# Altium PCB ClockPCB.PcbDoc (part 2 of 2)
Units mm, origin at the board's own origin, x right, y up, seen from the top; angles counter-clockwise.
Board outline 90 x 40 mm, 4 copper layers (Top Layer, L2, L3, Bottom Layer), stack 1.564 mm thick; 138 components, 106 nets, 450 pads, 188 vias.
Unrouted connection lines stored in the file: 60.
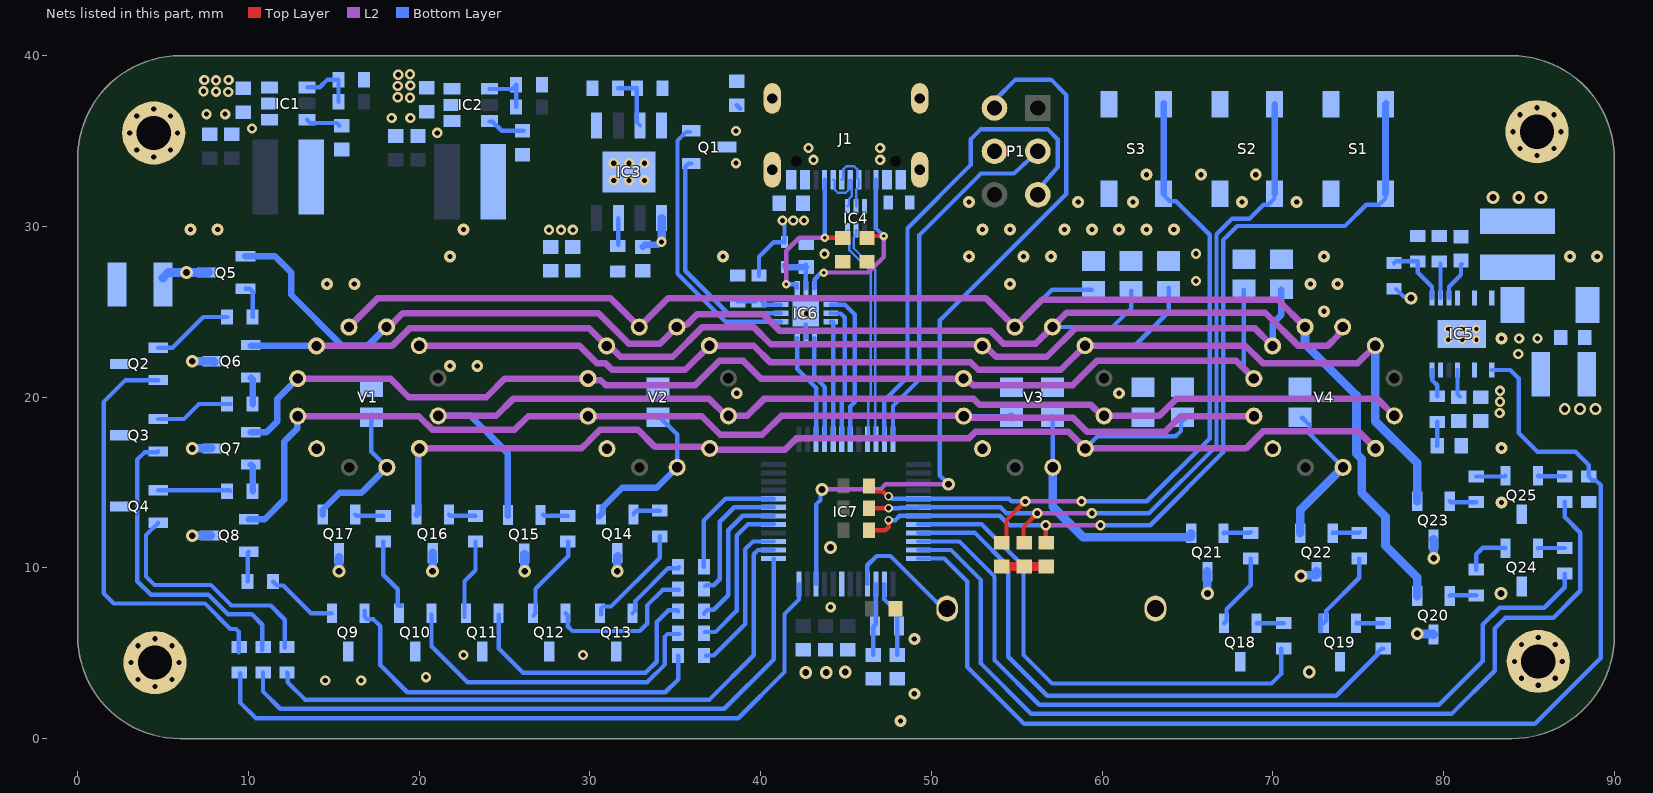
[diagram p4: the nets of this part, all layers, seen from the top]

## Via types
v1: diameter 0.6, hole 0.3, Top Layer to Bottom Layer, tented both sides, 61 vias
v2: diameter 0.7, hole 0.3, Top Layer to Bottom Layer, 42 vias
v3: diameter 0.65, hole 0.3, Top Layer to Bottom Layer, tented bottom, 32 vias
v4: diameter 0.75, hole 0.4, Top Layer to Bottom Layer, tented both sides, 25 vias
v5: diameter 0.6, hole 0.3, Top Layer to Bottom Layer, tented top, 6 vias
v6: diameter 0.5, hole 0.25, Top Layer to Bottom Layer, tented both sides, 6 vias
v7: diameter 0.5, hole 0.2, Top Layer to Bottom Layer, tented both sides, 4 vias
v8: diameter 0.5, hole 0.3, Top Layer to Bottom Layer, tented both sides, 4 vias
v9: diameter 0.7, hole 0.4, Top Layer to Bottom Layer, tented both sides, 4 vias
v10: diameter 0.55, hole 0.3, Top Layer to Bottom Layer, tented both sides, 4 vias

## Nets (pads, with @x,y where several pads share a name; then routed paths per layer and width w, separated by ;. In a path a pad name is that pad's centre, name@x,y a point inside that pad or via, vN(x,y) a via of type N, cw(c..) or ccw(c..) an arc to the next point about the centre after c; other vN are vias at no path point) (continued)
+50V: C18.2 C19.2 C20.2 D3.2 Q5.3 Q6.3 Q7.3 Q8.3 Q14.3 Q15.3 Q16.3 Q17.3 Q20.3 Q21.3 Q22.3 Q23.3 R16.2 | length 15.6
  Bottom Layer w0.254: R16.2@77.21,26.34 77.655,25.895 78.005,25.895 v4(78.1,25.8)
  Bottom Layer w0.508: C18.2@5,26.958 5,27.004 5.296,27.3 v4(6.375,27.3) Q5.3@7.575,27.3 7.64,27.3 Q5.3@7.671,27.33 ; v4(6.706,11.887) 6.712,11.894 7.769,11.894 Q8.3@7.775,11.9 ; v4(6.706,17) 7.78,17 Q7.3@7.823,17.043 ; v4(6.706,22.1) Q6.3@7.875,22.1 7.948,22.1 Q6.3@8.001,22.047 ; v4(15.3,9.804) 15.3,10.601 Q17.3@15.316,10.617 ; v4@20.777,9.855 20.789,9.867 20.789,10.857 Q16.3@20.803,10.871 ; Q15.3@26.149,10.807 26.169,10.788 26.169,9.823 v4(26.187,9.804) ; v4@31.598,9.881 31.598,10.643 Q14.3@31.623,10.668 ; v4(66.167,8.509) Q21.3@66.167,9.785 ; v4(71.653,9.525) 71.7,9.571 72.515,9.571 72.561,9.617 Q22.3@72.561,9.785 ; v4(78.461,6.147) 78.483,6.124 79.385,6.124 Q20.3@79.407,6.101 ; Q23.3@79.407,11.665 79.417,11.656 79.417,10.576 v4(79.426,10.566)
  other v4: 20.777,9.804 31.598,9.804
  other v9: 87.1,19.3 88,19.3 88.9,19.3
Anode_A: Q5.1 R14.2 V1.2 V2.2 V3.2 V4.2 | length 78.6
  L2 w0.381: V1.2@18.092,24.115 18.225,24.115 19.025,24.914 30.497,24.914 32.287,23.124 34.101,23.124 35.002,24.025 35.002,24.115 V2.2@35.092,24.115 35.211,24.233 35.652,24.233 36.286,24.867 40.133,24.867 41.1,23.9 53.443,23.9 54.219,23.124 56.101,23.124 V3.2@57.092,24.115 57.92,24.943 69.557,24.943 71.5,23 73.2,23 73.827,23.627 73.827,23.682 74.092,23.947 V4.2@74.092,24.115
  Bottom Layer w0.254: V3.2@57.092,24.115 60.615,24.115 61.7,25.2 R14.2@61.7,26.225
  Bottom Layer w0.381: Q5.1@9.825,28.25 11.55,28.25 12.5,27.3 12.5,26 15.5,23 16.977,23 V1.2@18.092,24.115 ; V2.2@34.974,23.996 V2.2@35.092,24.115
Anode_B: Q23.1 R13.2 V1.1 V2.1 V3.1 V4.1 | length 76.4
  L2 w0.381: V1.1@20.003,23.017 29.386,23.017 30.408,21.995 30.902,21.995 31.297,21.6 35.586,21.6 V2.1@37.003,23.017 39.594,23.017 40.574,22.037 52.309,22.037 52.746,21.6 57.586,21.6 V3.1@59.003,23.017 68.386,23.017 69.408,21.995 74.981,21.995 V4.1@76.003,23.017
  Bottom Layer w0.254: V3.1@59.003,23.017 61.917,23.017 63.9,25 R13.2@63.9,26.225 R13.2@63.9,26.4
  Bottom Layer w0.508: V4.1@76.003,23.017 76.003,18.594 78.457,16.14 Q23.1@78.457,13.915
Anode_C: Q16.1 R21.2 V1.10 V2.10 V3.10 V4.10 | length 69.5
  L2 w0.381: V1.10@20.017,16.997 20.031,17.011 29.511,17.011 29.925,17.425 ; 29.925,17.426 30.553,18.054 ; 30.554,18.054 30.6,18.1 32.8,18.1 33.816,17.084 36.93,17.084 37.103,16.911 41.411,16.911 42.1,17.6 52.207,17.6 52.584,17.978 58.036,17.978 V3.10@59.017,16.997 68.424,16.997 69.418,17.991 75.024,17.991 V4.10@76.017,16.997
  Bottom Layer w0.254: V3.10@59.017,16.997 59.741,17.72 64.32,17.72 64.618,18.018 64.618,18.518 R21.2@64.9,18.8
  Bottom Layer w0.381: Q16.1@19.85,13.125 19.934,13.209 19.934,16.913 V1.10@20.017,16.997
Anode_D: Q8.1 R24.2 V1.6 V2.6 V3.6 V4.6 | length 68.9
  L2 w0.381: V1.6@12.89,18.888 19.978,18.888 20.776,18.09 25.59,18.09 26.388,18.888 V2.6@29.89,18.888 36.551,18.888 37.64,17.8 40.1,17.8 41.2,18.9 V3.6@51.9,18.9 ; V3.6@51.9,18.888 52.005,18.784 58.308,18.784 59.128,17.963 63.671,17.963 64.596,18.888 V4.6@68.89,18.888
  Bottom Layer w0.254: V3.6@51.89,18.888 54.588,18.888 R24.2@54.6,18.9
  Bottom Layer w0.381: Q8.1@10.025,12.85 10.95,12.85 12.1,14 12.1,17.4 12.863,18.163 12.863,18.861 V1.6@12.89,18.888
  Bottom Layer w0.508: V3.6@51.9,18.9 V3.6@51.901,18.899 ; R24.2@54.668,18.857 R24.2@54.7,18.825
Anode_DP: Q15.1 R22.2 V1.11 V2.11 V3.11 V4.11 | length 69.5
  L2 w0.381: V1.11@21.115,18.908 24.508,18.908 25.496,19.896 36.993,19.896 37.982,18.908 39.208,18.908 40.196,19.896 52.486,19.896 52.837,19.546 59.344,19.546 59.982,18.908 63.358,18.908 64.347,19.896 76.126,19.896 V4.11@77.115,18.908
  Bottom Layer w0.254: V3.11@60.115,18.908 62.492,18.908 R22.2@62.5,18.9
  Bottom Layer w0.381: V1.11@21.115,18.908 22.992,18.908 25.2,16.7 Q15.1@25.2,13.053
Anode_E: Q7.1 R12.2 V1.5 V2.5 V3.5 V4.5 | length 69.5
  L2 w0.381: V1.5@12.885,21.092 18.3,21.092 19.392,20 23.922,20 25.015,21.092 V2.5@29.885,21.092 29.979,20.998 30.642,20.998 30.94,20.7 36.161,20.7 37.58,22.12 38.98,22.12 40.008,21.092 52.053,21.092 52.445,20.7 58.273,20.7 59.692,22.12 67.858,22.12 V4.5@68.885,21.092
  Bottom Layer w0.254: R12.2@68.3,26.3 68.3,21.753 68.885,21.168 V4.5@68.885,21.092
  Bottom Layer w0.381: Q7.1@10.125,17.95 11.054,17.95 11.7,18.596 11.7,19.907 V1.5@12.885,21.092
Anode_F: Q6.1 R11.2 V1.4 V2.4 V3.4 V4.4 | length 66.8
  L2 w0.381: V1.4@13.983,23.003 18.406,23.003 19.428,24.025 29.96,24.025 V2.4@30.983,23.003 31.15,23.003 31.791,22.362 34.859,22.362 36.601,24.105 39.584,24.105 40.589,23.1 V3.4@52.886,23.1 ; V3.4@52.983,23.003 53.15,23.003 53.791,22.362 56.765,22.362 58.428,24.025 68.96,24.025 69.886,23.1 V4.4@70,23.1
  Bottom Layer w0.381: Q6.1@10.148,23.027 V1.4@13.959,23.027 ; V4.4@69.983,23.003 69.983,24.297 70.5,24.814 R11.2@70.5,26.3
Anode_G: Q20.1 R15.2 V1.3 V2.3 V3.3 V4.3 | length 83.9
  L2 w0.381: V1.3@15.888,24.11 17.582,25.803 31.195,25.803 V2.3@32.888,24.11 34.579,25.8 53.198,25.8 V3.3@54.853,24.145 ; V3.3@54.915,24.206 54.985,24.206 56.484,25.705 70.293,25.705 V4.3@71.888,24.11
  Bottom Layer w0.254: V3.3@54.888,24.11 57.079,26.3 R15.2@59.4,26.3
  Bottom Layer w0.508: V4.3@71.888,24.11 71.888,23.112 74.9,20.1 74.9,16.689 75.2,16.389 75.2,14.4 76.6,13 76.6,11.3 78.457,9.443 Q20.1@78.457,8.351
DB: IC6.10 IC7.31 | length 9.1
  Bottom Layer w0.254: IC6.10@44.097,25.417 44.941,25.417 45.517,24.841 45.517,19.717 45.25,19.45 IC7.31@45.25,17.538
FLT: IC6.11 IC7.30 | length 8.1
  Bottom Layer w0.254: IC6.11@44.097,24.917 44.109,24.905 44.691,24.905 44.933,24.663 44.933,20.033 44.75,19.85 IC7.30@44.75,17.538
GND: BT1.1 C1.1 C2.1 C3.1 C4.1 C7.1 C8.1 C9.1 C10.1 C11.1 C12.1 C13.1 C14.1 C15.1 C16.1 C17.1 C18.1 C19.1 C20.1 C21.1 C22.1 C23.1 C24.1 C25.1 C26.1 C27.1 C28.1 C29.1 C30.1 C31.1 C32.1 D1.2 IC1.1 IC2.1 IC3.1 IC4.3 IC5.7 IC5.12 IC5.17 IC6.2 IC6.13 IC7.7 J1.A1_B12 J1.B1_A12 J1.SH1 J1.SH2 J1.SH3 J1.SH4 MH1.0 MH2.0 MH3.0 MH4.0 P1.4 Q2.3 Q3.3 Q4.3 Q9.3 Q10.3 Q11.3 Q12.3 Q13.3 Q18.3 Q19.3 Q24.3 Q25.3 R1.1 R3.1 R6.1 R7.1 R8.1 R9.1 R11.1 R12.1 R13.1 R14.1 R15.1 R18.1 R20.1 R21.1 R22.1 R23.1 R24.1 R25.1 R26.1 R31.1 S1.4 S2.4 S3.4 V1.7 V2.7 V3.7 V4.7 | length 3.4
  Top Layer w0.508: C32.1@54.1,10.1 54.12,10.08 C32.1@54.132,10.08 C31.1@55.432,10.08 C30.1@56.732,10.08
  Bottom Layer w0.254: IC6.2@42.647,23.467 IC6.13@42.647,24.257
  other v1: 14.5,3.4 16.6,3.4 20.4,3.6 22.6,4.9 29.6,4.9 44.1,7.7 84.379,22.53 84.43,23.444 85.496,23.444 42.697,24.892 65.5,26.8 43.739,28.397 65.5,28.4 21.057,35.484 10.211,35.738 18.39,36.347 19.482,36.347 7.544,36.576 8.636,36.576
  other v2: 48.2,1.03 49,2.63 49,5.83 83.4,13.83 83.4,17.03 38.6,20.23 61,20.23 21.8,21.83 23.4,21.83 83.4,23.43 73,25.03 14.6,26.63 16.2,26.63 54.6,26.63 72.2,26.63 73.8,26.63 21.8,28.23 37.8,28.23 52.2,28.23 55.4,28.23 57,28.23 73,28.23 87.4,28.23 89,28.23 6.6,29.83 8.2,29.83 22.6,29.83 53,29.83 54.6,29.83 57.8,29.83 59.4,29.83 61,29.83 62.6,29.83 64.2,29.83 52.2,31.43 58.6,31.43 61.8,31.43 68.2,31.43 71.4,31.43 62.6,33.03 65.8,33.03 69,33.03
  other v3: 4.525,3.05 85.55,3.125 3.535,3.46 5.515,3.46 84.56,3.535 86.54,3.535 3.125,4.45 5.925,4.45 84.15,4.525 86.95,4.525 3.535,5.44 5.515,5.44 84.56,5.515 86.54,5.515 4.525,5.85 85.55,5.925 4.45,34.075 85.475,34.15 3.46,34.485 5.44,34.485 84.485,34.56 86.465,34.56 3.05,35.475 5.85,35.475 84.075,35.55 86.875,35.55 3.46,36.465 5.44,36.465 84.485,36.54 86.465,36.54 4.45,36.875 85.475,36.95
  other v4: 42.647,3.872 43.84,3.872 44.958,3.897 72.136,3.912 83.363,8.509 44.1,11.2
  other v5: 31.4,32.7 32.3,32.7 33.2,32.7 31.4,33.7 32.3,33.7 33.2,33.7
  other v6: 80.275,23.365 81.1,23.365 81.926,23.365 80.275,24 81.1,24 81.926,24
Grid1: Q17.1 R26.2 V1.9 | length 8.3
  Bottom Layer w0.254: R26.2@17.2,18.7 17.2,16.802 V1.9@18.112,15.89
  Bottom Layer w0.381: Q17.1@14.35,13.125 14.35,13.4 15.35,14.4 16.621,14.4 V1.9@18.112,15.89 ; R26.2@17.2,18.825 R26.2@17.2,18.9
Grid2: Q14.1 R25.2 V2.9 | length 9.5
  Bottom Layer w0.254: R25.2@33.9,18.8 34.125,18.8 35.112,17.813 V2.9@35.112,15.89
  Bottom Layer w0.381: Q14.1@30.541,13.025 30.759,13.244 30.759,13.559 31.9,14.7 33.921,14.7 V2.9@35.112,15.89
Grid3: Q21.1 R23.2 V3.9 | length 14.4
  Bottom Layer w0.254: R23.2@57.1,18.9 57.112,18.888 V3.9@57.112,15.89
  Bottom Layer w0.508: V3.9@57.112,15.89 57.112,13.588 58.9,11.8 65.171,11.8 65.217,11.846 Q21.1@65.217,12.035
Grid4: Q22.1 R20.2 V4.9 | length 8.8
  Bottom Layer w0.254: R20.2@71.7,18.8 71.725,18.8 72.148,18.377 72.148,17.854 V4.9@74.112,15.89
  Bottom Layer w0.508: Q22.1@71.611,12.035 71.611,13.39 V4.9@74.112,15.89
Grid_1: IC7.17 R47.1 | length 9.2
  Bottom Layer w0.254: R47.1@36.75,6.248 37.348,6.248 38.6,7.5 38.6,11.9 39.25,12.55 IC7.17@40.762,12.55
Grid_2: IC7.20 R40.1 | length 7.3
  Bottom Layer w0.254: R40.1@36.671,10.068 36.671,12.771 37.95,14.05 IC7.20@40.762,14.05
Grid_3: IC7.44 R46.1 | length 29.9
  Bottom Layer w0.254: IC7.44@49.238,12.55 52.95,12.55 55.4,10.1 55.4,4.9 57.074,3.226 69.926,3.226 70.485,3.785 R46.1@70.485,5.258
Grid_4: IC7.45 R45.1 | length 35.5
  Bottom Layer w0.254: IC7.45@49.238,12.05 52.55,12.05 54.5,10.1 54.5,4.8 56.785,2.515 73.715,2.515 76.144,4.944 76.144,5.044 76.367,5.267 R45.1@76.467,5.267
HV_enable: IC5.1 IC7.48 R31.2 | length 70.1
  Bottom Layer w0.254: IC7.48@49.238,10.55 50.75,10.55 52.1,9.2 52.1,4.2 55.436,0.864 85.344,0.864 89.204,4.724 89.204,14.852 88.929,15.127 88.723,15.127 R31.2@88.5,15.35 88.5,16.029 87.729,16.8 85.5,16.8 84.4,17.9 84.4,21.1 83.905,21.595 IC5.1@82.819,21.595
NetC5_1: C5.1 IC2.6 | length 2.2
  Bottom Layer w0.254: IC2.6@24.133,36.15 24.283,36.15 24.833,35.6 C5.1@26.133,35.6
NetC5_2: C5.2 IC2.2 L2.1
NetC6_1: C6.1 IC1.6 | length 2
  Bottom Layer w0.254: IC1.6@13.427,36.25 13.62,36.057 15.17,36.057 C6.1@15.327,35.9
NetC6_2: C6.2 IC1.2 L1.1
NetC13_2: C13.2 IC5.11 | length 2.3
  Bottom Layer w0.254: IC5.11@80.319,25.809 80.319,26.463 81.026,27.169 81.026,27.769 C13.2@81.058,27.802
NetC14_2: C14.2 D2.1 IC6.8 | length 2.5
  Bottom Layer w0.254: IC6.8@42.647,26.367 C14.2@42.647,27.603 ; C14.2@42.647,27.741 C14.2@42.647,27.773
  Bottom Layer w0.381: D2.1@41.453,27.723 D2.1@41.46,27.73 ; D2.1@41.46,27.603 C14.2@42.647,27.603
NetC22_2: C22.2 IC5.5 | length 1.6
  Bottom Layer w0.254: IC5.5@80.819,21.595 80.819,20.175 C22.2@80.958,20.036
NetC23_2: C23.2 R27.1 | length 1.4
  Bottom Layer w0.254: C23.2@79.629,17.145 R27.1@79.629,18.554
NetD3_1: D3.1 IC5.14 IC5.16 L3.2
NetIC1_4: IC1.4 R1.2 R5.1 | length 3.3
  Bottom Layer w0.254: IC1.4@13.427,38.15 14.177,38.15 14.627,38.6 R1.2@15.277,38.6 R5.1@15.277,37.3
NetIC2_4: IC2.4 R4.1 R6.2 | length 3
  Bottom Layer w0.254: IC2.4@24.133,38.05 25.46,38.05 25.683,38.273 R6.2@25.683,38.3 R4.1@25.683,37
NetIC3_3: IC3.3 R2.1 R3.2 | length 3.4
  Bottom Layer w0.254: R3.2@31.65,38.1 R2.1@32.75,38.1 32.75,36.097 IC3.3@32.935,35.912
NetIC3_7: IC3.7 R9.2 | length 1.6
  Bottom Layer w0.254: IC3.7@31.665,30.488 31.665,28.939 R9.2@31.674,28.931
NetIC5_8: IC5.8 R27.2 | length 1.7
  Bottom Layer w0.254: IC5.8@79.319,21.595 79.345,21.569 79.345,20.985 79.629,20.701 R27.2@79.629,20.054
NetIC5_9: IC5.9 R8.2 R16.1 | length 3.8
  Bottom Layer w0.254: R16.1@77.216,27.952 R8.2@78.486,27.952 78.486,27.305 79.319,26.472 IC5.9@79.319,25.809
NetIC5_10: IC5.10 R7.2 | length 2
  Bottom Layer w0.254: IC5.10@79.819,25.809 R7.2@79.819,27.813
NetIC6_5: IC6.5 Q1.1 | length 13.2
  Bottom Layer w0.254: Q1.1@35.932,33.686 35.783,33.686 35.585,33.488 35.585,27.407 38.075,24.917 IC6.5@41.197,24.917
NetIC6_6: IC6.6 R17.1 R18.2 | length 2.6
  Bottom Layer w0.254: R18.2@38.659,25.615 R17.1@39.712,25.615 ; R17.1@39.712,25.742 R17.1@39.827,25.857 ; R17.1@39.923,25.762 R17.1@40.14,25.544 ; R17.1@40.14,25.417 IC6.6@41.197,25.417
NetQ2_1: Q2.1 R19.1 | length 4.8
  Bottom Layer w0.254: Q2.1@4.725,22.9 5.552,22.9 7.352,24.7 R19.1@8.75,24.7
NetQ2_2: Q2.2 R50.2 | length 25
  Bottom Layer w0.254: Q2.2@4.725,21 2.8,21 1.516,19.716 1.516,8.51 2.11,7.916 7.447,7.916 8.937,6.426 9.275,6.426 9.423,6.277 9.423,5.376 R50.2@9.423,5.057
NetQ3_1: Q3.1 R28.1 | length 4.6
  Bottom Layer w0.254: Q3.1@4.725,18.725 6.225,18.725 7.1,19.6 R28.1@8.95,19.6
NetQ3_2: Q3.2 R49.2 | length 18.4
  Bottom Layer w0.254: Q3.2@4.725,16.825 4.668,16.768 3.918,16.768 3.492,16.342 3.492,9.224 4.292,8.424 7.658,8.424 8.79,7.292 10.189,7.292 10.808,6.673 R49.2@10.808,5.18
NetQ4_1: Q4.1 R32.1 | length 4.2
  Bottom Layer w0.254: Q4.1@4.725,14.55 8.9,14.55 R32.1@8.95,14.5
NetQ4_2: Q4.2 R48.2 | length 14.3
  Bottom Layer w0.254: Q4.2@4.725,12.65 4,11.925 4,9.5 4.5,9 7.8,9 9,7.8 11.301,7.8 12.132,6.969 R48.2@12.132,5.32
NetQ5_2: Q5.2 R19.2 | length 2
  Bottom Layer w0.254: Q5.2@9.825,26.35 10.077,26.35 10.25,26.177 R19.2@10.25,24.7
NetQ6_2: Q6.2 R28.2 | length 1.6
  Bottom Layer w0.381: Q6.2@10.125,21.15 10.141,21.15 10.25,21.041 R28.2@10.25,19.6
NetQ7_2: Q7.2 R32.2 | length 1.6
  Bottom Layer w0.381: Q7.2@10.125,16.05 10.141,16.05 10.25,15.941 R32.2@10.25,14.5
NetQ8_2: Q8.2 R42.2 | length 1.8
  Bottom Layer w0.254: R42.2@9.95,9.2 9.95,10.875 Q8.2@10.025,10.95
NetQ9_1: Q9.1 R42.1 | length 4.2
  Bottom Layer w0.254: R42.1@11.45,9.2 11.45,9.191 11.673,8.968 12.032,8.968 13.649,7.351 Q9.1@14.884,7.351
NetQ9_2: Q9.2 R51.2 | length 23.6
  Bottom Layer w0.254: Q9.2@16.814,7.494 16.814,7.135 16.964,6.984 17.323,6.984 17.729,6.579 17.729,4.293 19.304,2.718 34.418,2.718 35.171,3.471 R51.2@35.171,4.868
NetQ10_1: Q10.1 R36.1 | length 4.3
  Bottom Layer w0.254: R36.1@17.9,11.55 17.9,9.6 18.751,8.749 18.751,7.799 18.782,7.768 Q10.1@18.958,7.768
NetQ10_2: Q10.2 R47.2 | length 19.4
  Bottom Layer w0.254: Q10.2@20.726,7.269 20.726,5.41 22.835,3.302 33.35,3.302 34.392,4.343 34.392,5.976 34.54,6.125 R47.2@35.227,6.125
NetQ11_1: Q11.1 R35.1 | length 4.7
  Bottom Layer w0.254: Q11.1@22.657,7.122 22.657,9.22 23.3,9.864 R35.1@23.3,11.55
NetQ11_2: Q11.2 R44.2 | length 16
  Bottom Layer w0.254: Q11.2@24.663,7.266 24.663,5.283 26.086,3.861 33.261,3.861 33.909,4.509 33.909,6.833 34.588,7.512 35.127,7.512 R44.2@35.171,7.468
NetQ12_1: Q12.1 R34.1 | length 5.2
  Bottom Layer w0.254: Q12.1@26.695,7.214 26.812,7.33 26.812,8.778 28.723,10.689 R34.1@28.723,11.55
NetQ12_2: Q12.2 R43.2 | length 9.1
  Bottom Layer w0.254: Q12.2@28.566,7.351 28.701,7.216 28.701,6.58 28.981,6.3 32.919,6.3 33.35,6.731 33.35,7.798 34.263,8.711 R43.2@35.197,8.711
NetQ13_1: Q13.1 R33.1 | length 6.3
  Bottom Layer w0.254: Q13.1@30.663,7.289 30.663,7.636 30.764,7.737 31.237,7.737 34.1,10.6 R33.1@34.1,11.85
NetQ13_2: Q13.2 R40.2 | length 4.2
  Bottom Layer w0.254: Q13.2@32.491,7.351 32.664,7.524 32.664,8.064 34.588,9.988 35.173,9.988 R40.2@35.218,10.033
NetQ14_2: Q14.2 R33.2 | length 1.7
  Bottom Layer w0.254: Q14.2@32.55,13.125 32.55,13.177 32.723,13.35 R33.2@34.1,13.35
NetQ15_2: Q15.2 R34.2 | length 1.5
  Bottom Layer w0.254: Q15.2@27.25,13.125 27.325,13.05 R34.2@28.7,13.05
NetQ16_2: Q16.2 R35.2 | length 1.6
  Bottom Layer w0.254: Q16.2@21.75,13.125 21.825,13.05 R35.2@23.3,13.05
NetQ17_2: Q17.2 R36.2 | length 1.7
  Bottom Layer w0.254: Q17.2@16.25,13.125 16.325,13.05 R36.2@17.9,13.05
NetQ18_1: Q18.1 R38.1 | length 4.4
  Bottom Layer w0.254: Q18.1@67.147,6.761 67.29,6.904 67.29,7.575 68.707,8.992 R38.1@68.707,10.553
NetQ18_2: Q18.2 R46.2 | length 1.6
  Bottom Layer w0.254: Q18.2@69.053,6.767 R46.2@70.637,6.767
NetQ19_1: Q19.1 R37.1 | length 5.6
  Bottom Layer w0.254: Q19.1@72.798,6.271 Q19.1@72.798,7.215 ; Q19.1@72.977,6.761 73.139,6.922 73.139,7.505 75.057,9.423 R37.1@75.057,10.553
NetQ19_2: Q19.2 R45.2 | length 1.6
  Bottom Layer w0.254: Q19.2@74.905,6.782 74.919,6.767 R45.2@76.467,6.767
NetQ20_2: Q20.2 R41.2 | length 1.6
  Bottom Layer w0.254: Q20.2@80.357,8.351 80.4,8.394 R41.2@81.915,8.394
NetQ21_2: Q21.2 R38.2 | length 1.6
  Bottom Layer w0.254: Q21.2@67.117,12.035 67.135,12.053 68.653,12.053 R38.2@68.7,12.1
NetQ22_2: Q22.2 R37.2 | length 1.6
  Bottom Layer w0.254: Q22.2@73.511,12.035 73.529,12.053 75.053,12.053 R37.2@75.1,12.1
NetQ23_2: Q23.2 R30.2 | length 1.6
  Bottom Layer w0.254: Q23.2@80.357,13.915 80.417,13.855 R30.2@81.915,13.855
NetQ24_1: Q24.1 R41.1 | length 2.8
  Bottom Layer w0.254: R41.1@81.915,9.894 81.915,10.795 82.296,11.176 83.614,11.176 Q24.1@83.632,11.158
NetQ24_2: Q24.2 R39.2 | length 1.6
  Bottom Layer w0.254: Q24.2@85.532,11.158 85.538,11.164 R39.2@87.095,11.164
NetQ25_1: Q25.1 R30.1 | length 1.7
  Bottom Layer w0.254: R30.1@81.915,15.355 83.599,15.355 Q25.1@83.632,15.389
NetQ25_2: Q25.2 R29.2 | length 1.6
  Bottom Layer w0.254: Q25.2@85.532,15.389 85.554,15.367 R29.2@87.095,15.367
NRST: IC7.10 P1.2 | length 44.3
  L2 w0.254: v4(43.6,14.6) 47.017,14.6 47.317,14.9 v4(51,14.9)
  Bottom Layer w0.254: IC7.10@43.25,9.062 43.25,13.717 43.505,13.972 43.505,14.505 v4(43.6,14.6) ; v4(51,14.9) 50.5,15.4 50.5,24.5 57.9,31.9 57.9,37.699 56.999,38.6 54.92,38.6 53.8,37.48 P1.2@53.8,37.4
OSC1: C26.2 IC7.2 Y1.1 | length 4.5
  Bottom Layer w0.254: IC7.2@47.25,9.062 47.25,8.15 48,7.4 48,6.558 47.998,6.556 47.998,4.902 C26.2@48,4.9
OSC2: C27.2 IC7.3 Y1.2 | length 4.2
  Bottom Layer w0.254: C27.2@46.6,4.9 46.598,4.902 46.598,6.556 46.75,6.708 IC7.3@46.75,9.062
PD_CC1: IC6.3 IC7.27 | length 6.4
  Bottom Layer w0.254: IC6.3@42.147,23.467 42.147,21.653 43.25,20.55 IC7.27@43.25,17.538
PD_CC1_C: C1.2 IC6.7 J1.A5 | length 10.1
  Top Layer w0.254: v7@43.782,29.319 v7(43.764,29.337) C1.2@44.806,29.337 ; C1.2@44.62,29.599 C1.2@44.78,29.439
  L2 w0.254: v7(41.5,26.621) 41.5,28.571 42.266,29.337 v7(43.764,29.337)
  Bottom Layer w0.254: v7(41.5,26.621) 42.124,26.621 IC6.7@42.124,26.391 ; v7(43.764,29.337) J1.A5@43.764,32.731
PD_CC2: IC6.1 IC7.28 | length 6.1
  Bottom Layer w0.254: IC6.1@43.147,23.467 43.147,21.192 43.75,20.589 43.75,17.615 IC7.28@43.745,17.61
PD_CC2_C: C2.2 IC6.9 J1.B5 | length 10.9
  Top Layer w0.254: C2.2@46.228,29.413 46.253,29.439 v7(47.219,29.439)
  L2 w0.254: v7(43.7,27.3) 46.299,27.3 47.219,28.219 v7(47.219,29.439)
  Bottom Layer w0.254: IC6.9@43.147,26.367 43.17,26.39 43.17,26.909 43.513,27.253 43.653,27.253 v7(43.7,27.3) ; J1.B5@46.75,32.745 46.75,29.882 v7@47.206,29.426
Seg_A: IC7.12 R50.1 | length 40.6
  Bottom Layer w0.254: R50.1@9.513,3.846 9.513,2.12 10.439,1.194 38.694,1.194 41.4,3.9 41.4,7.3 42.247,8.147 42.247,9.059 IC7.12@42.25,9.062
Seg_B: IC7.47 R29.1 | length 55.6
  Bottom Layer w0.254: IC7.47@49.238,11.05 51.15,11.05 52.9,9.3 52.9,4.4 55.852,1.448 80.467,1.448 82.994,3.974 82.994,6.452 83.615,7.074 86.423,7.074 88.011,8.661 88.011,12.065 87.095,12.981 R29.1@87.095,13.867
Seg_C: IC7.18 R44.1 | length 8.7
  Bottom Layer w0.254: R44.1@36.686,7.315 36.686,7.345 36.894,7.553 37.253,7.553 38.1,8.4 38.1,12.2 38.95,13.05 IC7.18@40.762,13.05
Seg_D: IC7.15 R51.1 | length 9.3
  Bottom Layer w0.254: R51.1@36.804,4.851 36.873,4.851 36.894,4.872 37.257,4.872 39.1,6.715 39.1,11.1 39.55,11.55 IC7.15@40.762,11.55
Seg_DP: IC7.19 R43.1 | length 7.9
  Bottom Layer w0.254: R43.1@36.764,8.944 36.803,8.983 37.253,8.983 37.6,9.33 37.6,12.7 38.45,13.55 IC7.19@40.762,13.55
Seg_E: IC7.14 R48.1 | length 36.6
  Bottom Layer w0.254: R48.1@12.257,3.876 12.302,3.832 12.302,3.294 13.31,2.286 37.008,2.286 39.6,4.878 39.6,10.8 39.847,11.047 40.759,11.047 IC7.14@40.762,11.05
Seg_F: IC7.13 R49.1 | length 38.5
  Bottom Layer w0.254: R49.1@10.857,3.876 10.857,2.757 11.862,1.753 37.871,1.753 40.762,4.643 IC7.13@40.762,10.55
Seg_G: IC7.46 R39.1 | length 49.6
  Bottom Layer w0.254: IC7.46@49.238,11.55 51.65,11.55 53.7,9.5 53.7,4.6 56.319,1.981 79.731,1.981 82.296,4.547 82.296,6.68 83.287,7.671 85.903,7.671 87.095,8.863 R39.1@87.095,9.664
SW1: C30.2 IC7.43 R52.1 S1.1 | length 52.9
  Top Layer w0.254: R52.1@46.35,12.2 47.3,12.2 47.5,12.4 v8(47.5,12.8) ; C30.2@56.7,11.5 v1(56.7,12.5)
  L2 w0.254: v1(56.7,12.5) v1(59.9,12.5)
  Bottom Layer w0.254: v8(47.5,12.8) 47.9,12.8 48.15,13.05 54.011,13.05 54.561,12.5 v1(56.7,12.5) ; v1(59.9,12.5) 62.817,12.5 67.1,16.783 67.1,29.203 67.92,30.023 74.223,30.023 75.471,31.271 76.227,31.271 76.6,31.644 S1.1@76.6,31.919
  Bottom Layer w0.381: S1.1@76.6,31.919 76.6,37.154 S1.1@76.657,37.211
SW2: C31.2 IC7.42 R53.1 S2.1 | length 46.4
  Top Layer w0.254: R53.1@46.4,13.5 v8(47.5,13.5) ; C31.2@55.4,11.4 55.4,12.4 v1(56.2,13.2)
  L2 w0.254: v1(56.2,13.2) v1(59.4,13.2)
  Bottom Layer w0.254: v8(47.5,13.5) 48.131,13.5 48.158,13.527 49.215,13.527 IC7.42@49.238,13.55 54.05,13.55 54.4,13.2 v1(56.2,13.2) ; v1(59.4,13.2) 62.755,13.2 66.7,17.145 66.7,29.54 67.615,30.455 68.636,30.455 69.452,31.271 69.727,31.271 70.1,31.644 S2.1@70.1,31.919
  Bottom Layer w0.381: S2.1@70.1,31.919 S2.1@70.1,37.156
SW3: C32.2 IC7.41 R54.1 S3.1 | length 45.7
  Top Layer w0.254: R54.1@46.5,14.7 46.5,14.55 46.573,14.477 47.156,14.477 47.433,14.2 v8(47.5,14.2) ; C32.2@54.132,11.48 54.4,11.748 54.4,12.8 v1(55.5,13.9)
  L2 w0.254: v1(55.5,13.9) v1(58.8,13.9)
  Bottom Layer w0.254: v8(47.5,14.2) 47.567,14.2 47.717,14.05 54.55,14.05 54.7,13.9 v1(55.5,13.9) ; v1(58.8,13.9) 62.617,13.9 66.3,17.583 66.3,29.509 64.332,31.477 63.973,31.477 63.6,31.85 S3.1@63.6,31.919
  Bottom Layer w0.381: S3.1@63.6,31.919 S3.1@63.6,37.169 63.6,37.209 S3.1@63.602,37.211
SWCLK: IC7.36 P1.3 | length 21.5
  Bottom Layer w0.254: IC7.36@47.75,17.538 47.75,19.48 49.3,21.03 49.3,29.499 52.901,33.1 54.841,33.1 P1.3@56.24,34.4
SWDIO: IC7.35 P1.5 | length 28.6
  Bottom Layer w0.254: IC7.35@47.25,17.538 47.25,19.818 48.6,21.168 48.6,29.9 52.3,33.6 52.3,35.1 52.9,35.7 56.8,35.7 57.4,35.1 57.4,33.475 P1.5@56.3,32.2
TCPP_Vcc: IC6.12 IC7.29 | length 7
  Bottom Layer w0.254: IC6.12@44.097,24.417 44.227,24.417 44.25,24.394 IC7.29@44.25,17.538
USB_MCU_N: IC4.6 IC7.33 | length 12.9
  Bottom Layer w0.14: IC4.6@45.093,29.78 45.173,29.7 45.173,29.358 45.188,29.343 45.188,28.612 46.447,27.353 46.447,19.847 46.295,19.695 46.295,17.583 IC7.33@46.25,17.538
USB_MCU_P: IC4.5 IC7.34 | length 12.8
  Bottom Layer w0.14: IC4.5@45.593,29.78 45.593,29.505 45.455,29.367 45.455,28.722 46.713,27.464 46.713,17.574 IC7.34@46.75,17.538
USB_N: IC4.1 J1.A7 J1.B7 | length 3.9
  Bottom Layer w0.14: J1.B7@44.25,32.745 44.33,32.665 44.33,32.161 44.518,31.973 44.982,31.973 45.17,32.161 45.17,32.665 J1.A7@45.25,32.745 45.33,32.665 45.33,32.166 45.338,32.158 45.338,31.778 45.173,31.614 45.173,31.26 IC4.1@45.093,31.18
USB_P: IC4.2 J1.A6 J1.B6 | length 3.9
  Bottom Layer w0.14: J1.A6@44.75,32.745 44.83,32.825 44.83,33.329 45.018,33.517 45.482,33.517 45.67,33.329 45.67,32.825 J1.B6@45.75,32.745 45.75,32.32 45.605,32.175 45.605,31.192 IC4.2@45.593,31.18
VBAT: BT1.2 IC7.4 | length 7.3
  Bottom Layer w0.254: IC7.4@46.25,9.062 46.25,10.15 46.8,10.7 47.6,10.7 50.276,8.024 50.375,8.024 50.779,7.62 BT1.2@50.927,7.62
VBUS: C4.2 C7.2 C15.2 C16.2 C17.2 C21.2 IC1.3 IC2.3 IC3.5 IC5.3 L3.1 | length 2.6
  Bottom Layer w0.381: C15.2@33.1,28.8 33.226,28.926 33.966,28.926 34.141,29.1 v1(34.2,29.1)
  Bottom Layer w0.508: v1(34.2,29.1) 34.202,29.102 34.202,30.485 IC3.5@34.205,30.488
  other v1: 83.287,19.075 83.312,19.736 83.312,20.371 27.6,29.8 28.3,29.8 29,29.8 19.456,37.541 18.745,37.567 8.814,37.871 8.103,37.897 7.366,37.922 18.745,38.227 19.482,38.252 8.103,38.557 7.417,38.583 8.839,38.583 18.771,38.887 19.456,38.913
  other v4: 82.9,31.7 84.4,31.7 85.7,31.7
VBUS_C: C3.2 C12.2 D1.1 D2.2 J1.A4_B9 J1.B4_A9 Q1.3 R17.2 | length 4.4
  Bottom Layer w0.254: C3.2@38.6,37.1 C3.2@38.8,36.9 ; R17.2@39.903,27.115 39.903,28.219 40.767,29.083 D2.2@41.275,29.083 ; v1(41.275,30.353) 41.275,30.259 41.402,30.132 D2.2@41.402,29.083
  other v1: 41.91,30.353 42.545,30.353 38.557,33.706 43.1,33.9 47,33.9 42.8,34.6 47,34.6 38.557,35.585
VBUS_RAW: IC3.4 IC6.4 Q1.2 R2.2 | length 16
  Bottom Layer w0.254: Q1.2@35.839,35.535 35.636,35.535 35.128,35.027 35.128,27.229 37.94,24.417 IC6.4@41.197,24.417
pads on no net: IC1.5 IC2.5 IC3.2 IC3.6 IC3.8 IC4.4 IC5.6 IC7.1 IC7.5 IC7.8 IC7.9 IC7.11 IC7.16 IC7.21 IC7.22 IC7.23 IC7.24 IC7.25 IC7.26 IC7.32 IC7.37 IC7.38 IC7.39 IC7.40 J1. J1.A8 J1.B8 P1.1 V1.12 V2.12 V3.12 V4.12

## Polygon pours and split planes (outlines as drawn)
GND on Bottom Layer "L4_GND" (solid, pour order 33): 0,6 0,34 cw(c6,34) 6,40 84,40 cw(c84,34) 90,34 90,6 cw(c84,6) 84,0 6,0 cw(c6,6)
+3V3 on Bottom Layer "L4_3V3_MCU" (solid, pour order 31): 45.4,8.2 45.8,8.2 45.8,7.2 45.7,7.2 45.7,6.3 42,6.3 42,7.2 45,7.2 45,8.2 45.1,8.2 45.1,11.4 45.1,16.1 46.2,16.1 46.2,10.5 45.4,10.5
VBUS on Bottom Layer "L4_3V3_Buck_IN" (solid, pour order 22): 7.01,38.938 7.163,38.938 9.246,38.938 9.677,38.506 11.709,38.506 11.709,37.795 10.338,37.795 10.058,37.516 7.01,37.516 6.858,37.668 6.858,38.862
VBUS on Bottom Layer "L4_1V_Buck_IN" (solid, pour order 23): 18.466,39.319 19.761,39.319 20.041,39.04 20.041,38.608 20.142,38.506 22.428,38.506 22.428,37.719 20.218,37.719 19.837,37.338 19.837,37.186 18.415,37.186 18.313,37.287 18.313,39.129
VBUS on Bottom Layer "L4_VBUS_CAP" (solid, pour order 30): 27.1,30.1 27.1,28.4 29.6,28.4 29.6,30.1
VBUS_C on Bottom Layer "L4_MOSFET_VBUS" (solid, pour order 29): 37.3,33.2 37.2,33.3 37.2,36.4 38,36.4 38,37.6 39.2,37.6 39.2,36.5 38.9,36.5 38.9,33.2
VBUS_C on Bottom Layer "L4_USB_C_PWR_1" (solid, pour order 26): 42.291,32.131 42.062,31.902 42.062,30.861 40.818,30.861 40.818,29.972 42.901,29.972 42.901,32.563 42.901,33.5 43.6,33.5 43.6,35.128 42.291,35.128 42.291,32.995
VBUS_C on Bottom Layer "L4_USB_C_PWR_2" (solid, pour order 28): 47.092,32.108 47.092,33.5 46.6,33.5 46.584,33.516 46.584,35.1 47.727,35.1 47.727,32.173 47.8,32.1 47.8,30.9 47.2,30.9 47.2,32
VBUS_RAW on Bottom Layer "L4_USB_BUS_VOLTAGE" (solid, pour order 25): 35.484,35.128 36.576,35.128 36.576,36.932 34.773,36.932 34.773,38.765 33.888,38.765 33.833,38.765 33.833,35.128
VBUS on Bottom Layer "L4_50V_Boost_IN" (solid, pour order 24): 81.559,22.073 82.067,22.073 82.067,20.676 82.194,20.549 82.829,20.549 83.007,20.726 83.718,20.726 83.718,18.669 82.88,18.669 82.779,18.771 82.779,19.456 82.702,19.533 81.61,19.533 81.61,20.498 81.559,20.549 81.559,21.057
+3V3 on Bottom Layer "L4_3V3_Buck_OUT" (solid, pour order 4): 9.423,30.705 11.731,30.705 11.731,35.099 10.207,35.099 10.207,34.489 7.123,34.489 7.123,31.496 9.423,31.496
NetC6_2 on Bottom Layer "L4_3V3_Buck_SW" (solid, pour order 3): 12.178,34.785 12.789,34.785 12.929,34.646 12.929,30.709 14.427,30.709 14.427,34.087 15.926,34.087 15.926,34.912 14.427,34.912 14.427,35.112 12.751,35.112 12.751,37.553 10.744,37.553 10.744,36.855 12.178,36.855
NetC5_2 on Bottom Layer "L4_1V_Buck_SW" (solid, pour order 6): 23.431,34.48 23.571,34.341 23.571,30.416 25.07,30.416 25.07,33.807 26.492,33.807 26.492,34.595 25.07,34.595 25.07,34.823 23.317,34.823 23.317,37.465 21.438,37.465 21.438,36.767 22.668,36.767 22.668,34.48
VBUS on Bottom Layer "SMPS_VBUS_INDUCTOR" (solid, pour order 18): 86.5,32.3 86.5,29.6 82.1,29.6 82.1,32.3
+1V on Bottom Layer "L4_1V_Buck_OUT" (solid, pour order 11): 20.396,30.404 20.396,31.267 18.085,31.267 18.085,34.341 20.872,34.341 20.872,34.823 22.396,34.823 22.396,30.404
NetD3_1 on Bottom Layer "SMPS_SWITCHING" (solid, pour order 5): 84.709,26.924 86.487,26.924 86.487,28.321 82.169,28.321 82.169,26.289 81.661,26.289 81.661,25.4 83.439,25.4 83.439,24.384 84.709,24.384
+50V on Bottom Layer "SMPS_OUT_50V" (solid, pour order 12): 87.566,22.581 86.677,22.581 86.677,18.669 86.804,18.669 89.218,18.669 89.218,19.934 89.223,19.939 89.235,26.543 87.566,26.543
+3V3 on L2 "L2_3V3" (solid, pour order 27): 46.7,8.1 47.4,7.4 47.4,0 5.3,0 0,5.3 0,33.786 10,33.893 10,30.378 5.478,30.378 4.6,29.5 4.6,9.758 8,6 41.7,6 43.8,8.1
VBUS on L2 "L2_VBUS" (solid, pour order 21): 78.7,22.9 77.4,24.2 77.4,28.3 78,29.1 88.612,29.1 90,30.488 90,37.432 87.432,40 0,40 0,34.6 21.61,34.6 23.647,32.563 23.647,28.651 24.599,27.7 35.7,27.7 36.3,28.3 36.3,33.4 36.9,34 71.7,34 74.397,31.303 74.397,18.872 74.769,18.5 84.108,18.5 84.4,18.792 84.4,21.7 83.2,22.9
VBUS_C on L2 "L2_VBUS_C" (solid, pour order 19): 49.6,35.465 49.6,29.235 37.3,29.235 37.3,35.293 38.307,36.3 48.765,36.3
+1V on L2 "L2_1V" (solid, pour order 17): 11.6,25.883 11.633,25.883 14.046,28.296 20.142,28.296 21.311,29.464 21.311,32.969 20.422,33.858 14.122,33.858 9.491,29.227 9.488,28.512 9.5,28.5 9.5,13.85 10.25,13.1 73.4,13.1 73.4,18.1 16.4,18.1 14.1,15.8 12.5,15.8 11.6,16.7
+50V on L2 "L2_50V" (solid, pour order 16): 42.1,8.8 39.8,6.5 8.8,6.5 5.3,10 5.3,28.4 5.45,28.55 8.65,28.55 8.8,28.4 8.8,12.1 83.89,12.1 85.09,13.591 85.09,23.31 83.5,24.9 77.4,24.9 77.4,27.026 88.824,27.026 90,25.849 90,4.4 86.8,0.435 50.1,0.435 50.1,7.8 49.1,8.8
GND on Top Layer "L1_GND" (solid, pour order 32): 0,6 0,34 cw(c6,34) 6,40 84,40 cw(c84,34) 90,34 90,6 cw(c84,6) 84,0 6,0 cw(c6,6)
+3V3 on Top Layer "L1_SwitchPullup_3V3" (solid, pour order 9): 64.7,-6.2 61.3,-6.2 61.3,-8.2 64.7,-8.2
GND on L3 "GND_L3" (solid, pour order 15): 0,6 0,34 cw(c6,34) 6,40 84,40 cw(c84,34) 90,34 90,6 cw(c84,6) 84,0 6,0 cw(c6,6)

## Silkscreen, mask and mechanical layers (free items; w line width, h text height)
Top Overlay:
  text "VFD Tube Clock" at 11.25,33.809 h4
  text "Rev A" at 30.95,31.678 h2.5
  text "github.com/jackon274/VFD_Clock_Hardware" at 47.65,2.663 h1.8
Bottom Overlay:
  lines w0.127: 81.8,17.8 81.9,17.7 81.9,16.2 ; 83.3,16.4 83.3,16.6 83.3,16.8 83.3,17.9 83,18.2 ; 83,18.2 83,18.2
  text "USB" at 50.476,36.45 h1.74 r270
  text "SWD" at 57.35,29.276 h1.74
  text "RTC BACKUP" at 60.81,7.673 h1.52
  text "CR1220" at 59.285,6.223 h1.52
Mechanical 1:
  the board outline again, w0.254

## Text inside footprints (layer, text, board x,y; h text height)
P1: Bottom Overlay "1" at 56.748,38.972 h0.61 r90